# EAGLE board base (EAGLE 9.4.1)

Size 160 x 100 mm. Coordinates in mm from the lower left corner, seen from the top.
Outline: 0,0 160,0 160,100 0,100 0,0
Copper layers (1*16): Top 0.035mm / dielectric 1.5mm / Bottom 0.035mm
Design rules "default": minimum track width 0.9mm, minimum drill 0.35mm, track to track 10mil, track to pad 10mil, pad to pad 8mil, via to via 8mil, smd to smd 6mil, copper to edge 20mil, drill to drill 6mil, minimum pad ring 10mil, minimum via ring 8mil, stop-mask expansion 4mil, vias tented up to drill 0mil, thermal gap 10mil

## Footprints (pad centres in the part's own frame; a part is rotated, then mirrored left to right if it is on the bottom)
C025-030X050 = drill 0.9 pad 1.9: 1 -1.27,0; 2 1.27,0
E2,5-5 = drill 0.813 pad 1.6: + -1.27,0 | drill 0.813 pad 1.6 octagon: - 1.27,0
DIL24-3 = drill 0.813 long: 1 -13.97,-3.81; 2 -11.43,-3.81; 3 -8.89,-3.81; 4 -6.35,-3.81; 5 -3.81,-3.81; 6 -1.27,-3.81; 7 1.27,-3.81; 8 3.81,-3.81; 9 6.35,-3.81; 10 8.89,-3.81; 11 11.43,-3.81; 12 13.97,-3.81; 13 13.97,3.81; 14 11.43,3.81; 15 8.89,3.81; 16 6.35,3.81; 17 3.81,3.81; 18 1.27,3.81; 19 -1.27,3.81; 20 -3.81,3.81; 21 -6.35,3.81; 22 -8.89,3.81; 23 -11.43,3.81; 24 -13.97,3.81
1X03 = drill 1.016 long: 1 -2.54,0; 2 0,0; 3 2.54,0
1X04 = drill 1.016 long: 1 -3.81,0; 2 -1.27,0; 3 1.27,0; 4 3.81,0
1X07 = drill 1.016 long: 1 -7.62,0; 2 -5.08,0; 3 -2.54,0; 4 0,0; 5 2.54,0; 6 5.08,0; 7 7.62,0
ARDUINO-NANO-3.0 = drill 1 long: J1.1 17.78,7.62; J1.2 15.24,7.62; J1.3 12.7,7.62; J1.4 10.16,7.62; J1.5 7.62,7.62; J1.6 5.08,7.62; J1.7 2.54,7.62; J1.8 0,7.62; J1.9 -2.54,7.62; J1.10 -5.08,7.62; J1.11 -7.62,7.62; J1.12 -10.16,7.62; J1.13 -12.7,7.62; J1.14 -15.24,7.62; J1.15 -17.78,7.62; J2.1 17.78,-7.62; J2.2 15.24,-7.62; J2.3 12.7,-7.62; J2.4 10.16,-7.62; J2.5 7.62,-7.62; J2.6 5.08,-7.62; J2.7 2.54,-7.62; J2.8 0,-7.62; J2.9 -2.54,-7.62; J2.10 -5.08,-7.62; J2.11 -7.62,-7.62; J2.12 -10.16,-7.62; J2.13 -12.7,-7.62; J2.14 -15.24,-7.62; J2.15 -17.78,-7.62 | hole 1.651: -20.32,7.62; -20.32,-7.62; 20.32,-7.62; 20.32,7.62
TO220BV = drill 1.016 long: D 0,-2.54; G -2.54,-2.54; S 2.54,-2.54
0207/10 = drill 0.8 pad 1.8: 1 -5.08,0; 2 5.08,0
TO92-EBC = drill 0.813 long: B 0,-1.27; C 2.54,-1.27; E -2.54,-1.27
W237-103 = drill 1.194 long: 1 -5,-1.29; 2 0,-1.29; 3 5,-1.29

## Placement (x,y rotation side)
C1  [C025-030X050]  -59.69,-163.83 0 top  (outside the outline)
C2  [E2,5-5]  -59.69,-168.91 0 top  (outside the outline)
IC1  MAX7219CNG  [DIL24-3]  -44.45,-149.86 0 top  (outside the outline)
JP1  [1X03]  -58.42,-200.66 0 top  (outside the outline)
JP_ENABLE  [1X04]  -57.15,-140.97 0 top  (outside the outline)
JP_SEGMENTO  [1X07]  -53.34,-134.62 0 top  (outside the outline)
M1  ARDUINO-NANO-3.0  [ARDUINO-NANO-3.0]  -39.37,-184.15 0 top  (outside the outline)
Q1  [TO220BV]  17.78,73.66 0 top
Q2  [TO220BV]  29.21,73.66 0 top
Q3  [TO220BV]  40.64,73.66 0 top
Q4  [TO220BV]  52.07,73.66 0 top
Q5  IRF740  [TO220BV]  -57.15,0 0 top  (outside the outline)
Q6  IRF740  [TO220BV]  -57.15,-8.89 0 top  (outside the outline)
Q7  IRF740  [TO220BV]  -57.15,-17.78 0 top  (outside the outline)
Q8  IRF740  [TO220BV]  -57.15,-26.67 0 top  (outside the outline)
Q9  IRF740  [TO220BV]  -57.15,-35.56 0 top  (outside the outline)
Q10  IRF740  [TO220BV]  -57.15,-44.45 0 top  (outside the outline)
Q11  IRF740  [TO220BV]  -57.15,-53.34 0 top  (outside the outline)
R1  2k  [0207/10]  -19.05,25.4 0 top  (outside the outline)
R2  10k  [0207/10]  -31.75,25.4 0 top  (outside the outline)
R3  2k  [0207/10]  -44.45,25.4 0 top  (outside the outline)
R4  100  [0207/10]  -57.15,-66.04 0 top  (outside the outline)
R5  10k  [0207/10]  -19.05,30.48 0 top  (outside the outline)
R6  10k  [0207/10]  -31.75,30.48 0 top  (outside the outline)
R7  10k  [0207/10]  -44.45,30.48 0 top  (outside the outline)
R8  10k  [0207/10]  -57.15,30.48 0 top  (outside the outline)
R9  10k  [0207/10]  -19.05,35.56 0 top  (outside the outline)
R10  10k  [0207/10]  -31.75,35.56 0 top  (outside the outline)
R11  10k  [0207/10]  -44.45,35.56 0 top  (outside the outline)
R12  10k  [0207/10]  -57.15,35.56 0 top  (outside the outline)
R13  10k  [0207/10]  -19.05,40.64 0 top  (outside the outline)
R14  10k  [0207/10]  -31.75,40.64 0 top  (outside the outline)
R15  10k  [0207/10]  -44.45,40.64 0 top  (outside the outline)
R16  10k  [0207/10]  -57.15,40.64 0 top  (outside the outline)
R17  10k  [0207/10]  -19.05,45.72 0 top  (outside the outline)
R18  10k  [0207/10]  -31.75,45.72 0 top  (outside the outline)
R19  10k  [0207/10]  -44.45,45.72 0 top  (outside the outline)
R20  10k  [0207/10]  -57.15,45.72 0 top  (outside the outline)
R21  2k  [0207/10]  -19.05,50.8 0 top  (outside the outline)
R22  10k  [0207/10]  -31.75,50.8 0 top  (outside the outline)
R23  2k  [0207/10]  -44.45,50.8 0 top  (outside the outline)
R24  100  [0207/10]  -57.15,-71.12 0 top  (outside the outline)
R25  10k  [0207/10]  17.78,76.2 180 top
R26  10k  [0207/10]  17.78,80.01 180 top
R27  2k  [0207/10]  -44.45,55.88 0 top  (outside the outline)
R28  10k  [0207/10]  -57.15,55.88 0 top  (outside the outline)
R29  2k  [0207/10]  -19.05,60.96 0 top  (outside the outline)
R30  100  [0207/10]  -57.15,-76.2 0 top  (outside the outline)
R31  10k  [0207/10]  -44.45,60.96 0 top  (outside the outline)
R32  10k  [0207/10]  -57.15,60.96 0 top  (outside the outline)
R33  2k  [0207/10]  -19.05,66.04 0 top  (outside the outline)
R34  10k  [0207/10]  -31.75,66.04 0 top  (outside the outline)
R35  2k  [0207/10]  -44.45,66.04 0 top  (outside the outline)
R36  100  [0207/10]  -57.15,-81.28 0 top  (outside the outline)
R37  10k  [0207/10]  -19.05,71.12 0 top  (outside the outline)
R38  10k  [0207/10]  -31.75,71.12 0 top  (outside the outline)
R39  100  [0207/10]  -57.15,-86.36 0 top  (outside the outline)
R40  100  [0207/10]  -57.15,-91.44 0 top  (outside the outline)
R41  100  [0207/10]  -57.15,-96.52 0 top  (outside the outline)
R42  100  [0207/10]  -57.15,-101.6 0 top  (outside the outline)
R43  100  [0207/10]  -57.15,-106.68 0 top  (outside the outline)
R44  100  [0207/10]  -57.15,-111.76 0 top  (outside the outline)
R45  100  [0207/10]  -57.15,-116.84 0 top  (outside the outline)
R46  10k  [0207/10]  -57.15,-158.75 0 top  (outside the outline)
T1_0  [TO92-EBC]  17.78,90.17 0 top
T1_1  [TO92-EBC]  17.78,83.82 180 top
T2_0  [TO92-EBC]  29.21,90.17 0 top
T2_1  [TO92-EBC]  29.21,83.82 180 top
T3_0  [TO92-EBC]  40.64,90.17 0 top
T3_1  [TO92-EBC]  40.64,83.82 180 top
T4_0  [TO92-EBC]  52.07,90.17 0 top
T4_1  [TO92-EBC]  52.07,83.82 180 top
X1  [W237-103]  -54.61,-121.92 0 top  (outside the outline)

## Library data of the parts
C1 C2 R1-R46 = rcl
IC1 = maxim; MF: MAXIM; MPN: MAX7219CNG; OC_FARNELL: 1523914; OC_NEWARK: 34C4018
JP1 JP_ENABLE JP_SEGMENTO = pinhead
M1 = diy-modules
Q1-Q11 = transistor-power
T1_0 T1_1 T2_0 T2_1 T3_0 T3_1 T4_0 T4_1 = transistor-neu-to92
X1 = con-wago-500; MPN: 237-103; OC_FARNELL: unknown; OC_NEWARK: 18M7116

## Nets
3V3: M1.J2.14
5V: C1.1 C2.+ IC1.19 JP1.3 M1.J2.4 R2.2 R22.2 R28.2 R34.2 R46.1
A_IN: IC1.14 R4.2 R7.2
A_OUT: JP_SEGMENTO.1 Q5.D R8.1
B_IN: IC1.16 R9.2 R24.2
B_OUT: JP_SEGMENTO.2 Q6.D R10.1
C_IN: IC1.20 R11.2 R30.2
C_OUT: JP_SEGMENTO.3 Q7.D R12.1
CLK: IC1.13 M1.J2.15
CS: IC1.12 M1.J1.15
D_IN: IC1.23 R13.2 R36.2
D_OUT: JP_SEGMENTO.4 Q8.D R14.1
E_IN: IC1.21 R15.2 R39.2
E_OUT: JP_SEGMENTO.5 Q11.D R16.1
EN_1_IN: IC1.2 R21.1
EN_1_OUT: JP_ENABLE.1 Q1.D R26.1
EN_2_IN: IC1.11 R1.1
EN_2_OUT: JP_ENABLE.2 Q2.D R6.1
EN_3_IN: IC1.6 R27.1
EN_3_OUT: JP_ENABLE.3 Q3.D R32.1
EN_4_IN: IC1.7 R33.1
EN_4_OUT: JP_ENABLE.4 Q4.D R38.1
F_IN: IC1.15 R17.2 R40.2
F_OUT: JP_SEGMENTO.6 Q10.D R18.1
G_IN: IC1.17 R19.2 R41.2
G_OUT: JP_SEGMENTO.7 Q9.D R20.1
GND: C1.2 C2.- IC1.4 IC1.9 M1.J1.4 M1.J2.2 Q5.S Q6.S Q7.S Q8.S Q9.S Q10.S Q11.S R6.2 R7.1 R9.1 R11.1 R13.1 R15.1 R17.1 R19.1 R26.2 R32.2 R38.2 T1_0.E T1_1.E T2_0.E T2_1.E T3_0.E T3_1.E T4_0.E T4_1.E X1.3
MOSI: IC1.1 M1.J1.14
N$1: R1.2 T2_0.B
N$2: R2.1 R3.2 T2_0.C
N$3: R3.1 T2_1.B
N$4: R5.2 R43.1 T2_1.C
N$5: Q5.G R4.1
N$6: Q6.G R24.1
N$7: Q7.G R30.1
N$8: Q8.G R36.1
N$9: Q1.G R42.2
N$10: Q10.G R40.1
N$11: Q9.G R41.1
N$12: Q2.G R43.2
N$13: Q3.G R44.2
N$14: Q4.G R45.2
N$15: IC1.18 R46.2
N$16: Q11.G R39.1
N$21: JP1.1 M1.J2.1
N$29: R21.2 T1_0.B
N$30: R22.1 R23.2 T1_0.C
N$31: R23.1 T1_1.B
N$32: R25.2 R42.1 T1_1.C
N$36: R27.2 T3_0.B
N$37: R28.1 R29.2 T3_0.C
N$38: R29.1 T3_1.B
N$39: R31.2 R44.1 T3_1.C
N$43: R33.2 T4_0.B
N$44: R34.1 R35.2 T4_0.C
N$45: R35.1 T4_1.B
N$46: R37.2 R45.1 T4_1.C
V_LOGIC: JP1.2 X1.2
VCC: Q1.S Q2.S Q3.S Q4.S R5.1 R8.2 R10.2 R12.2 R14.2 R16.2 R18.2 R20.2 R25.1 R31.1 R37.1 X1.1

## Tracks (layer width: path | path; a pad name or v marks a point on that pad's centre or on a via)
5V  (9 unrouted)
A_IN  (2 unrouted)
A_OUT  (2 unrouted)
B_IN  (2 unrouted)
B_OUT  (2 unrouted)
C_IN  (2 unrouted)
C_OUT  (2 unrouted)
CLK  (1 unrouted)
CS  (1 unrouted)
D_IN  (2 unrouted)
D_OUT  (2 unrouted)
E_IN  (2 unrouted)
E_OUT  (2 unrouted)
EN_1_IN  (1 unrouted)
EN_1_OUT  (2 unrouted)
EN_2_IN  (1 unrouted)
EN_2_OUT  (2 unrouted)
EN_3_IN  (1 unrouted)
EN_3_OUT  (2 unrouted)
EN_4_IN  (1 unrouted)
EN_4_OUT  (2 unrouted)
F_IN  (2 unrouted)
F_OUT  (2 unrouted)
G_IN  (2 unrouted)
G_OUT  (2 unrouted)
GND  (32 unrouted)
MOSI  (1 unrouted)
N$1  (1 unrouted)
N$2  (2 unrouted)
N$3  (1 unrouted)
N$4  (2 unrouted)
N$5  (1 unrouted)
N$6  (1 unrouted)
N$7  (1 unrouted)
N$8  (1 unrouted)
N$9  (1 unrouted)
N$10  (1 unrouted)
N$11  (1 unrouted)
N$12  (1 unrouted)
N$13  (1 unrouted)
N$14  (1 unrouted)
N$15  (1 unrouted)
N$16  (1 unrouted)
N$21  (1 unrouted)
N$29  (1 unrouted)
N$30  (2 unrouted)
N$31  (1 unrouted)
N$32  (2 unrouted)
N$36  (1 unrouted)
N$37  (2 unrouted)
N$38  (1 unrouted)
N$39  (2 unrouted)
N$43  (1 unrouted)
N$44  (2 unrouted)
N$45  (1 unrouted)
N$46  (2 unrouted)
V_LOGIC  (1 unrouted)
VCC  (15 unrouted)